# EAGLE board cv04dobes (EAGLE 7.7.0)
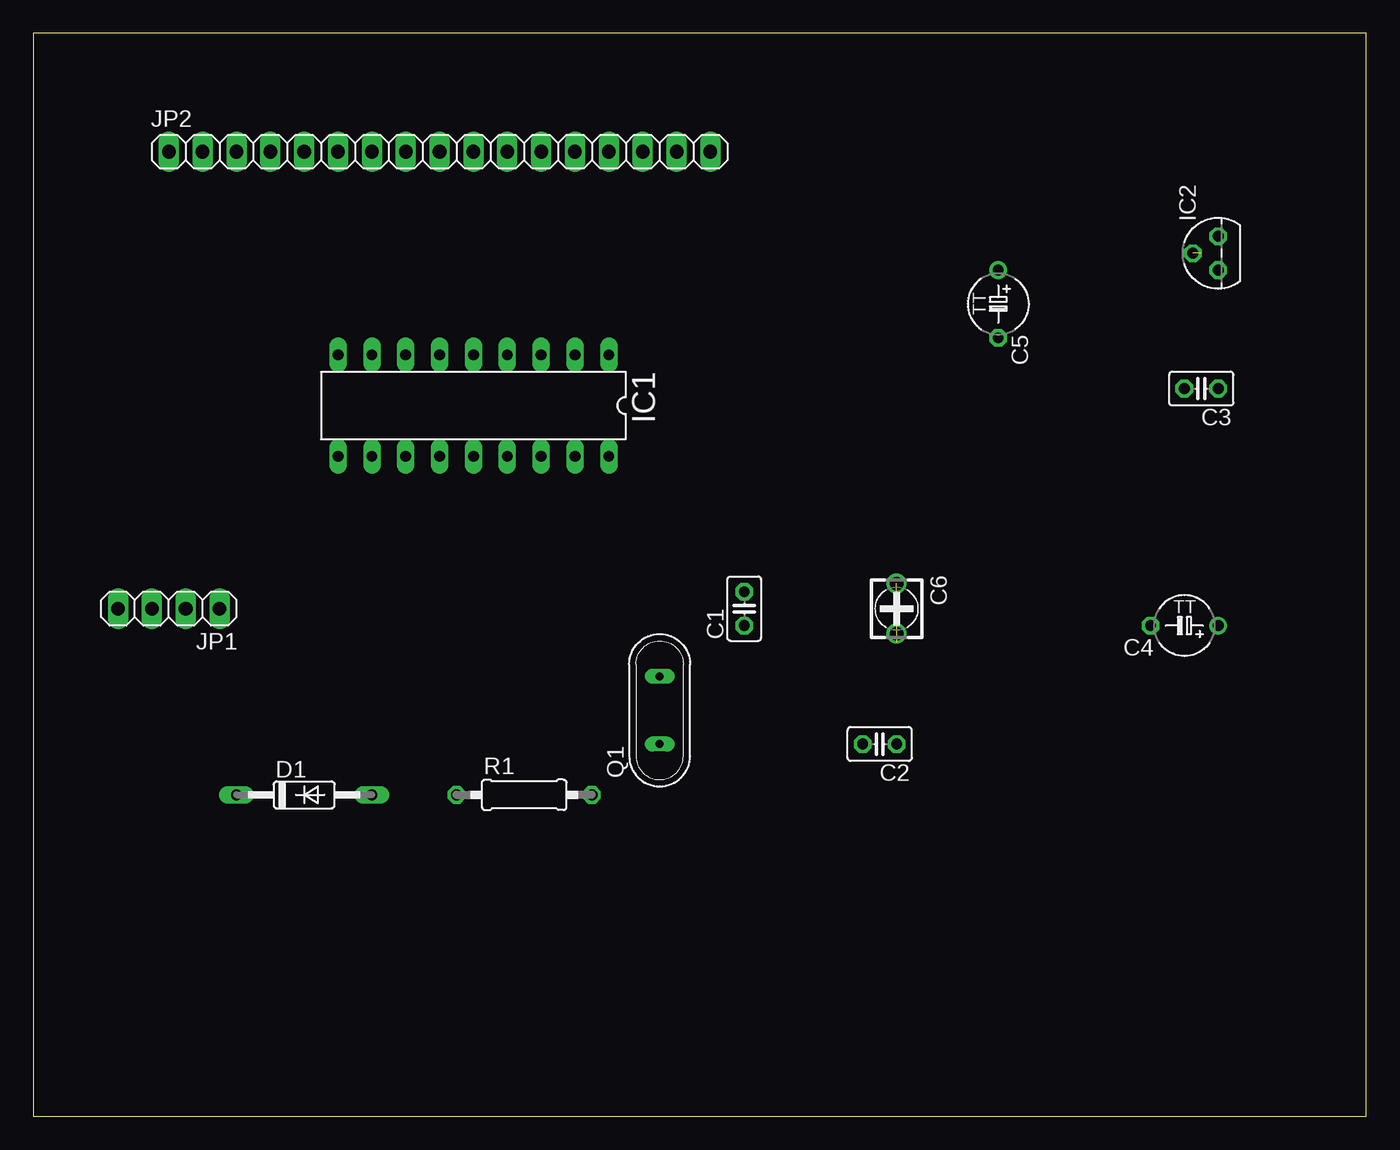
[diagram p0: board, top side]
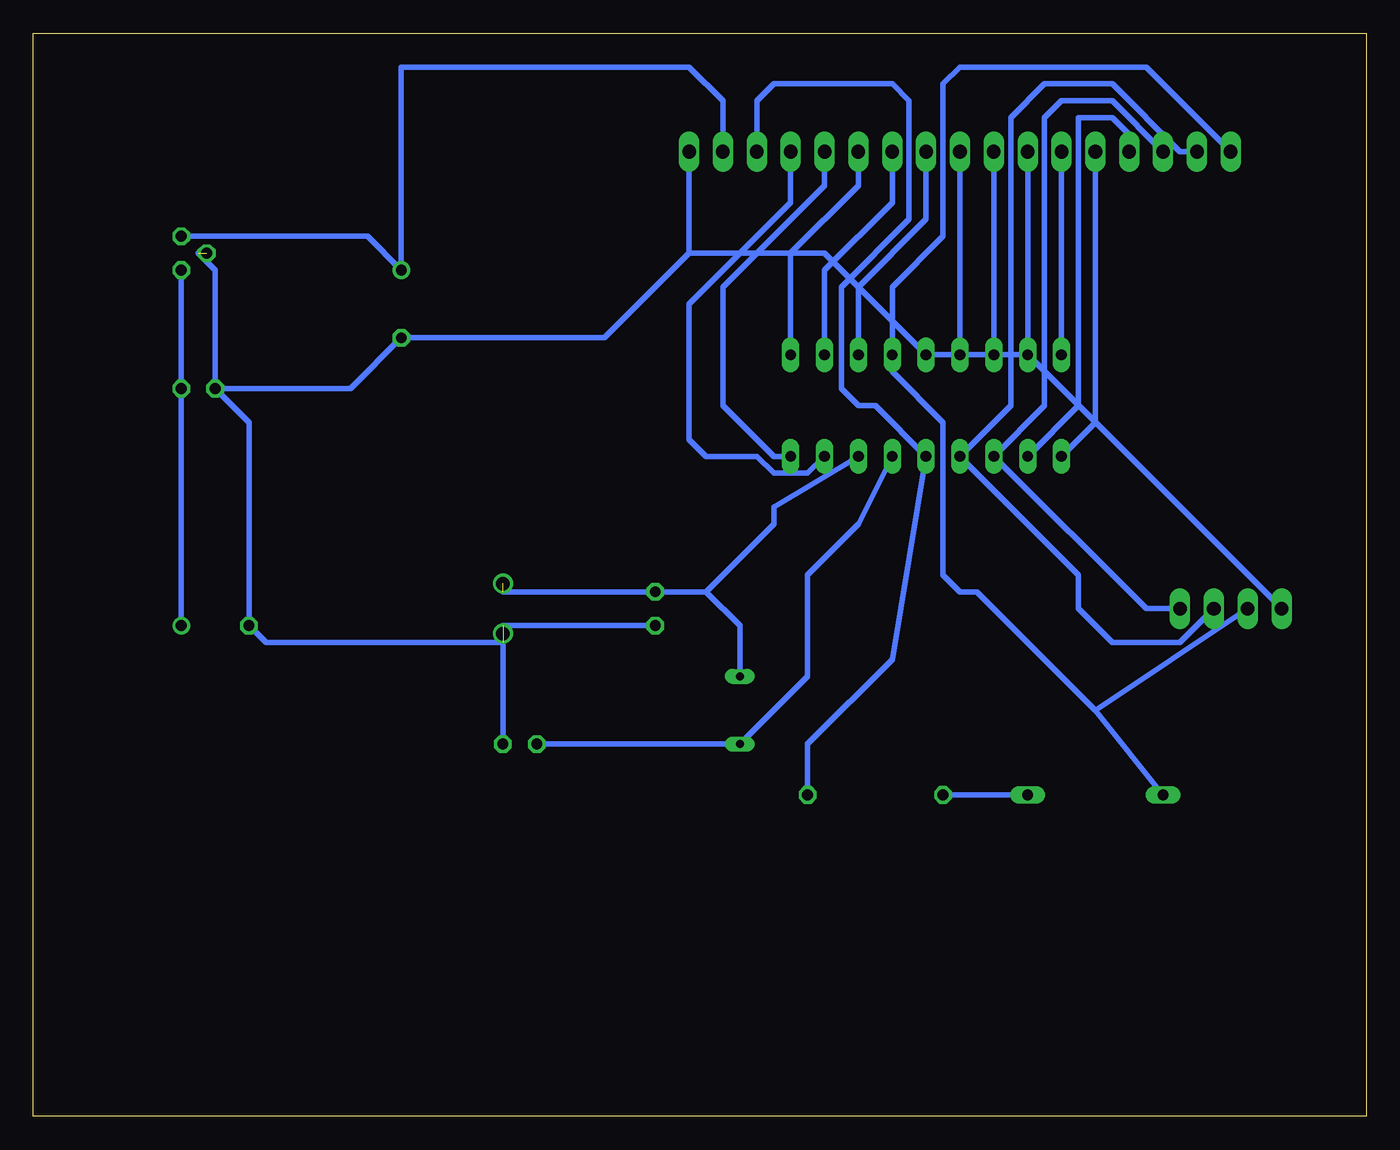
[diagram p1: board, bottom side, seen from below]

Size 100 x 81.27 mm. Coordinates in mm from the lower left corner, seen from the top.
Outline: 0,0 100,0 100,81.27 0,81.27 0,0
Copper layers (1*16): Top 0.035mm / dielectric 1.5mm / Bottom 0.035mm
Design rules "default": minimum track width 10mil, minimum drill 24mil, track to track 8mil, track to pad 8mil, pad to pad 8mil, via to via 8mil, smd to smd 8mil, copper to edge 40mil, drill to drill 8mil, minimum pad ring 10mil, minimum via ring 8mil, stop-mask expansion 4mil, vias tented up to drill 0mil, thermal gap 10mil
Net classes: 0 default: width 0.3 mm, drill 0.6 mm, clearance 0.2 mm; 1 power: width 0.4 mm, drill 0.6 mm, clearance 0.2 mm

## Footprints (pad centres in the part's own frame; a part is rotated, then mirrored left to right if it is on the bottom)
C025-025X050 = drill 0.813 octagon: 1 -1.27,0; 2 1.27,0
TAP5-45 = drill 0.813: + -2.54,0 | drill 0.813 octagon: - 2.54,0
CTRIM3008 = drill 1: + -1.875,0; - 1.875,0
DO35-10 = drill 0.813 long: A 5.08,0; C -5.08,0
DIL18 = drill 0.813 long: 1 -10.16,-3.81; 2 -7.62,-3.81; 3 -5.08,-3.81; 4 -2.54,-3.81; 5 0,-3.81; 6 2.54,-3.81; 7 5.08,-3.81; 8 7.62,-3.81; 9 10.16,-3.81; 10 10.16,3.81; 11 7.62,3.81; 12 5.08,3.81; 13 2.54,3.81; 14 0,3.81; 15 -2.54,3.81; 16 -5.08,3.81; 17 -7.62,3.81; 18 -10.16,3.81
TO92 = drill 0.813 octagon: 1 -1.27,0; 2 0,1.905; 3 1.27,0
1X04 = drill 1.016 long: 1 -3.81,0; 2 -1.27,0; 3 1.27,0; 4 3.81,0
1X17 = drill 1.016 long: 1 -20.32,0; 2 -17.78,0; 3 -15.24,0; 4 -12.7,0; 5 -10.16,0; 6 -7.62,0; 7 -5.08,0; 8 -2.54,0; 9 0,0; 10 2.54,0; 11 5.08,0; 12 7.62,0; 13 10.16,0; 14 12.7,0; 15 15.24,0; 16 17.78,0; 17 20.32,0
QS = drill 0.61 long: 1 -2.54,0; 2 2.54,0
0207/10 = drill 0.813 octagon: 1 -5.08,0; 2 5.08,0

## Placement (x,y rotation side)
C1  30p  [C025-025X050]  53.34,38.1 90 top
C2  30p  [C025-025X050]  63.5,27.94 180 top
C3  10n  [C025-025X050]  87.63,54.61 180 top
C4  47u/25V  [TAP5-45]  86.36,36.83 180 top
C5  47u  [TAP5-45]  72.39,60.96 270 top
C6  33p  [CTRIM3008]  64.77,38.1 270 top
D1  1N4148  [DO35-10]  20.32,24.13 0 top
IC1  PIC16F84AP  [DIL18]  33.02,53.34 180 top
IC2  78L05Z  [TO92]  88.9,64.77 90 top
JP1  PROG  [1X04]  10.16,38.1 180 top
JP2  APPL  [1X17]  30.48,72.39 0 top
Q1  [QS]  46.99,30.48 90 top
R1  2,2k  [0207/10]  36.83,24.13 0 top

## Library data of the parts
C1 C2 R1 = resistor
C3-C6 = rcl
D1 = diode
IC1 = microchip
IC2 = linear
JP1 JP2 = pinhead
Q1 = special

## Nets
+5V [power]: IC1.14 JP2.15 R1.2
MCLR/PGM: D1.C IC1.4 JP1.3 JP2.1
N$1: C3.1 C4.+ IC2.1
N$2: C1.2 C6.+ IC1.16 Q1.2
N$3: C2.2 IC1.15 Q1.1
N$4: D1.A R1.1
N$5: C1.1 C2.1 C3.2 C4.- C5.- C6.- IC1.5 IC2.2 JP1.4 JP2.17
RA0: IC1.17 JP2.14
RA1: IC1.18 JP2.13
RA2: IC1.1 JP2.12
RA3: IC1.2 JP2.11
RA4: IC1.3 JP2.10
RB0: IC1.6 JP2.9
RB1: IC1.7 JP2.8
RB2: IC1.8 JP2.7
RB3: IC1.9 JP2.6
RB4: IC1.10 JP2.5
RB5: IC1.11 JP2.4
RB6/CLK: IC1.12 JP1.1 JP2.3
RB7/DATA: IC1.13 JP1.2 JP2.2
V+ [power]: C5.+ IC2.3 JP2.16

## Tracks (layer width: path | path; a pad name or v marks a point on that pad's centre or on a via)
+5V
  Bottom 0.406: R1.2 41.91,27.94 35.56,34.29 IC1.14 36.83,53.34 38.1,53.34 39.37,54.61 39.37,62.23 34.29,67.31 34.29,76.2 35.56,77.47 44.45,77.47 45.72,76.2 JP2.15
MCLR/PGM
  Bottom 0.406: D1.C 20.32,30.48 | 20.32,30.48 JP1.3 | JP2.1 16.51,78.74 30.48,78.74 31.75,77.47 31.75,66.04 35.56,62.23 IC1.4 35.56,55.88 31.75,52.07 31.75,40.64 30.48,39.37 29.21,39.37 20.32,30.48
N$1
  Bottom 0.406: IC2.1 C3.1 C4.+
N$2  (1 unrouted)
  Bottom 0.406: 64.77,39.37 C1.2 49.53,39.37 | Q1.2 46.99,36.83 49.53,39.37 | IC1.16 44.45,45.72 44.45,44.45 49.53,39.37
N$3
  Bottom 0.406: C2.2 Q1.1 41.91,33.02 41.91,40.64 38.1,44.45 IC1.15
N$4
  Bottom 0.406: R1.1 D1.A
N$5  (3 unrouted)
  Bottom 0.406: 87.63,64.77 86.36,63.5 C3.2 | JP2.17 50.8,64.77 | 50.8,64.77 57.15,58.42 C5.- 76.2,54.61 C3.2 | C3.2 83.82,52.07 C4.- 82.55,35.56 64.77,35.56 C2.1 | C1.1 64.77,36.83 | 50.8,64.77 40.64,64.77 IC1.5 25.4,57.15 JP1.4
RA0
  Bottom 0.406: JP2.14 43.18,68.58 50.8,60.96 50.8,50.8 49.53,49.53 45.72,49.53 44.45,48.26 41.91,48.26 IC1.17
RA1
  Bottom 0.406: JP2.13 40.64,69.85 48.26,62.23 48.26,53.34 44.45,49.53 IC1.18
RA2
  Bottom 0.406: JP2.12 38.1,69.85 43.18,64.77 IC1.1
RA3
  Bottom 0.406: JP2.11 35.56,68.58 40.64,63.5 IC1.2
RA4
  Bottom 0.406: JP2.10 33.02,67.31 38.1,62.23 IC1.3
RB0
  Bottom 0.406: JP2.9 IC1.6
RB1
  Bottom 0.406: JP2.8 IC1.7
RB2
  Bottom 0.406: JP2.7 IC1.8
RB3
  Bottom 0.406: JP2.6 IC1.9
RB4
  Bottom 0.406: JP2.5 20.32,52.07 IC1.10
RB5
  Bottom 0.406: JP2.4 17.78,73.66 19.05,74.93 21.59,74.93 21.59,53.34 IC1.11
RB6/CLK
  Bottom 0.406: JP2.3 19.05,76.2 22.86,76.2 24.13,74.93 24.13,53.34 IC1.12 16.51,38.1 JP1.1
RB7/DATA
  Bottom 0.406: JP2.2 13.97,72.39 19.05,77.47 24.13,77.47 26.67,74.93 26.67,53.34 IC1.13 21.59,40.64 21.59,38.1 19.05,35.56 13.97,35.56 JP1.2
V+
  Bottom 0.406: IC2.3 74.93,66.04 C5.+ 72.39,78.74 50.8,78.74 48.26,76.2 JP2.16